# EAGLE board boarduino_breakout (EAGLE 4.16)
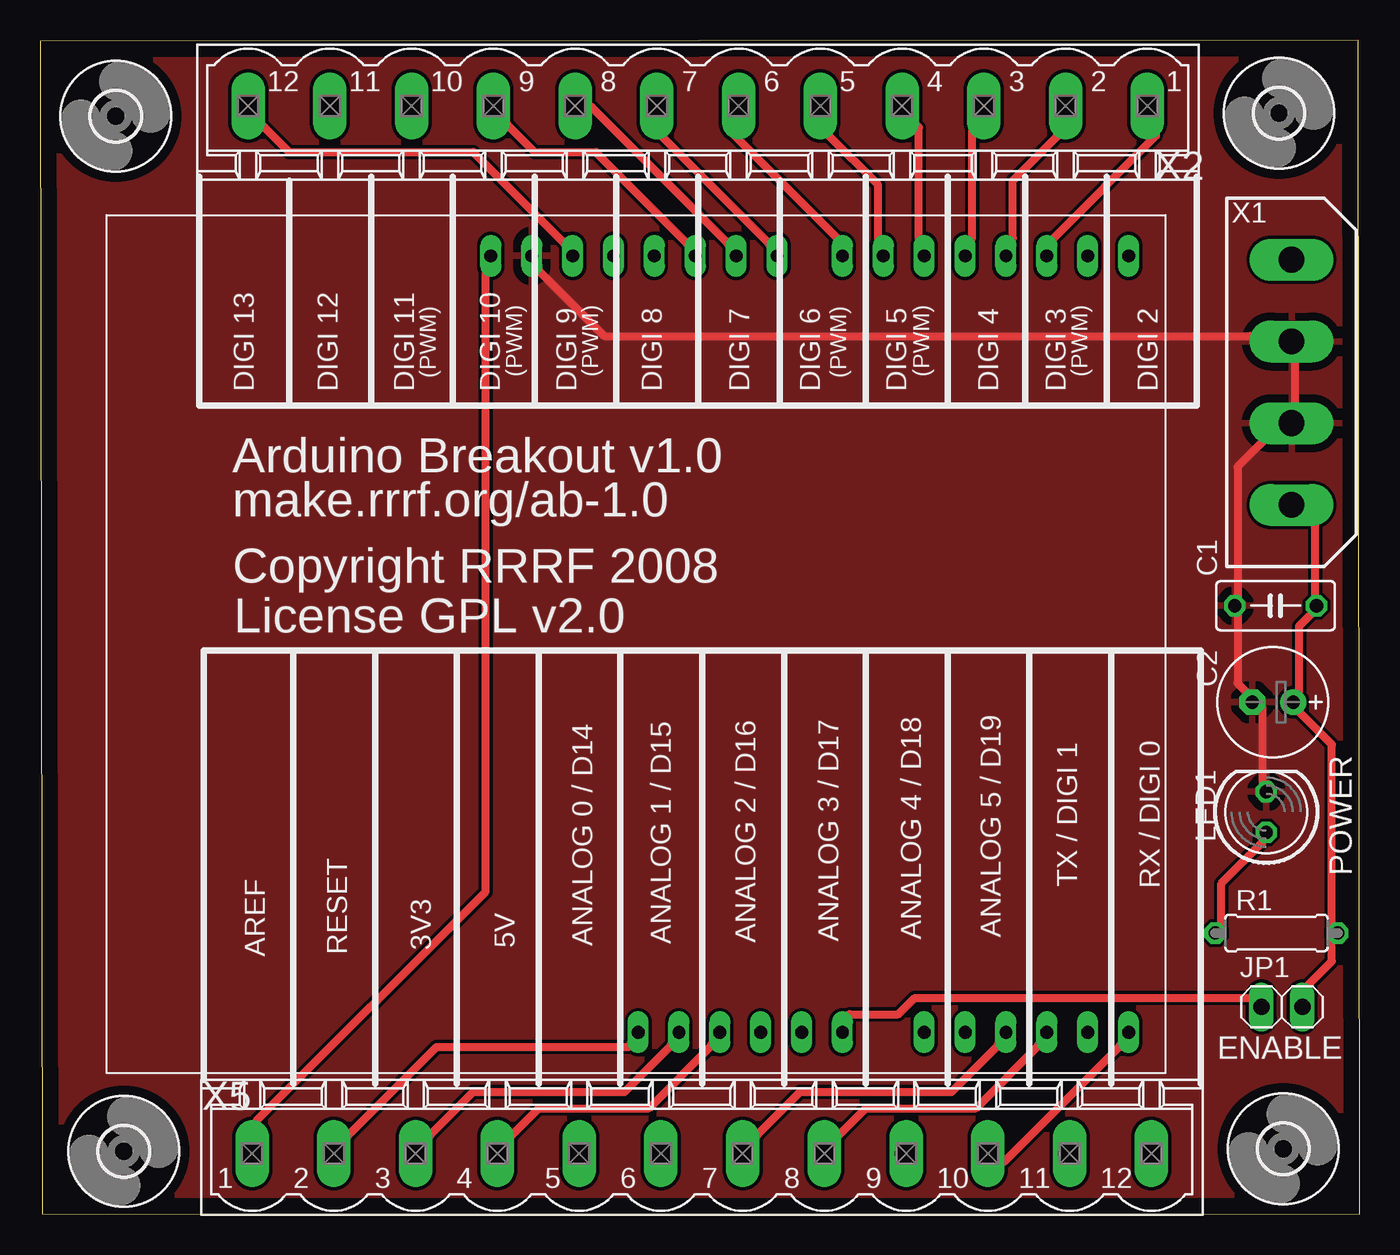
[diagram p0: board, top side]
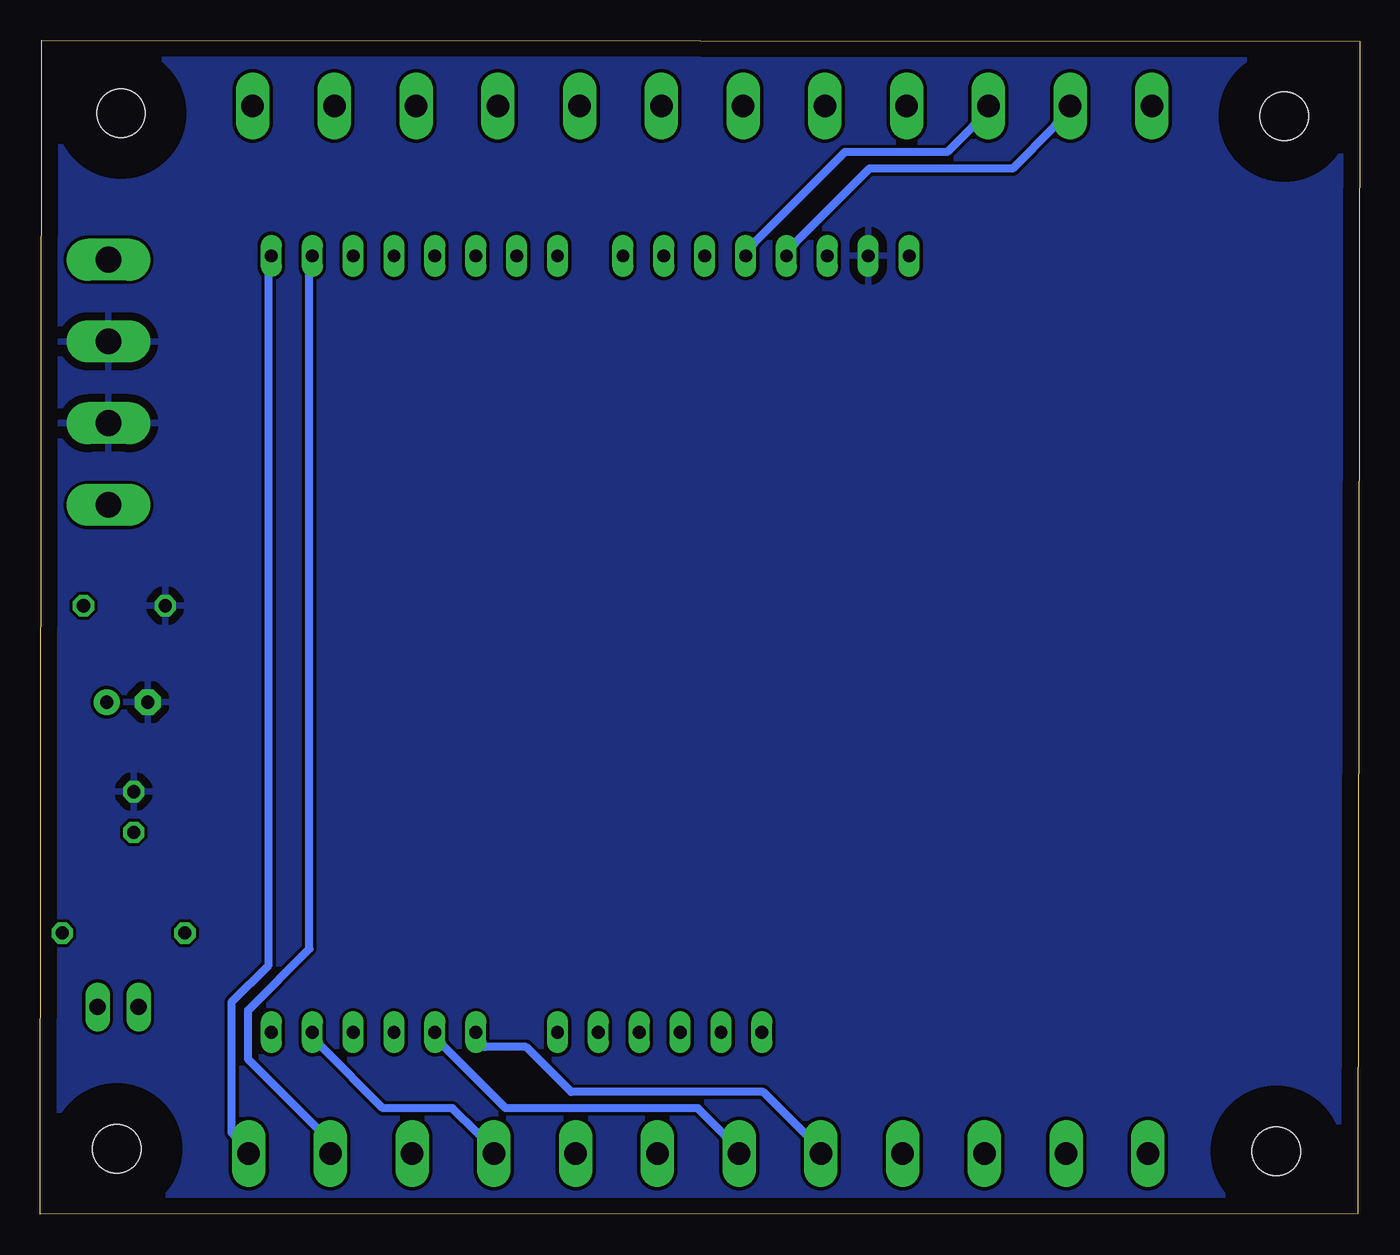
[diagram p1: board, bottom side, seen from below]

Size 81.99 x 72.99 mm. Coordinates in mm from the lower left corner, seen from the top.
Outline: 0.13,0.02 81.99,0 81.89,72.99 0,72.94 0.13,0.02
Copper layers (1*16): Top 0.035mm / dielectric 1.5mm / Bottom 0.035mm
Design rules "default": minimum track width 10mil, minimum drill 24mil, track to track 8mil, track to pad 8mil, pad to pad 8mil, via to via 8mil, smd to smd 8mil, copper to edge 40mil, drill to drill 8mil, minimum pad ring 10mil, minimum via ring 8mil, stop-mask expansion 4mil, vias tented up to drill 0mil, thermal gap 20mil
Net classes: 0 default: width 0.508 mm, drill 0.406 mm

## Footprints (pad centres in the part's own frame; a part is rotated, then mirrored left to right if it is on the bottom)
C050-030X075 = drill 0.813 octagon: 1 -2.54,0; 2 2.54,0
E2,5-7 = drill 0.813 pad 1.6 round: + -1.27,0 | drill 0.813 pad 1.6 octagon: - 1.27,0
3,0 = hole 3: 0,0
1X02 = drill 1.016 long: 1 -1.27,0; 2 1.27,0
LED5MM = drill 0.813 octagon: A -1.27,0; K 1.27,0
0207/7 = drill 0.813 octagon: 1 -3.81,0; 2 3.81,0
ARDUINO = drill 0.8 long: 3V3 6.604,-45.72; 5V 9.144,-45.72; ANALOG0 21.844,-45.72; ANALOG1 24.384,-45.72; ANALOG2 26.924,-45.72; ANALOG3 29.464,-45.72; ANALOG4 32.004,-45.72; ANALOG5 34.544,-45.72; AREF -5.08,2.54; DIGITAL2 29.464,2.54; DIGITAL3 26.924,2.54; DIGITAL4 24.384,2.54; DIGITAL5 21.844,2.54; DIGITAL6 19.304,2.54; DIGITAL7 16.764,2.54; DIGITAL8 12.7,2.54; DIGITAL9 10.16,2.54; DIGITAL10 7.62,2.54; DIGITAL11 5.08,2.54; DIGITAL12 2.54,2.54; DIGITAL13 0,2.54; GND -2.54,2.54; GND1 14.224,-45.72; GND2 11.684,-45.72; RESET 4.064,-45.72; RX 34.544,2.54; TX 32.004,2.54; VIN 16.764,-45.72
9090-4V = drill 1.6 pad 2.6 long: 1 -7.62,0; 2 -2.54,0; 3 2.54,0; 4 7.62,0
MSTBV12 = drill 1.397 long: 1 -27.94,0; 2 -22.86,0; 3 -17.78,0; 4 -12.7,0; 5 -7.62,0; 6 -2.54,0; 7 2.54,0; 8 7.62,0; 9 12.7,0; 10 17.78,0; 11 22.86,0; 12 27.94,0

## Placement (x,y rotation side)
C1  100nf  [C050-030X075]  76.76,37.84 180 top
C2  100uF  [E2,5-7]  76.59,31.84 180 top
H1  MOUNT-HOLE3.0  [3,0]  77.23,4.08 0 top
H2  MOUNT-HOLE3.0  [3,0]  76.97,68.45 0 top
H3  MOUNT-HOLE3.0  [3,0]  5.19,3.93 0 top
H4  MOUNT-HOLE3.0  [3,0]  4.69,68.27 0 top
JP1  [1X02]  77.15,12.9 0 top
LED1  [LED5MM]  76.18,25.01 90 top
R1  560  [0207/7]  76.81,17.49 0 top
U$1  ARDUINODIECIMILIA  [ARDUINO]  33.08,57.04 0 top
X1  9090-4V  [9090-4V]  77.75,51.72 270 top
X2  MSTBV12  [MSTBV12]  40.86,68.91 180 top
X5  MSTBV12  [MSTBV12]  41.11,3.78 0 top

## Library data of the parts
C1 C2 R1 = rcl
H1-H4 = holes
JP1 = pinhead
LED1 = led
U$1 = reprap
X1 = con-thomas-betts
X2 X5 = con-phoenix-508

## Nets
GND: C1.2 C2.- LED1.K U$1.GND X1.2 X1.3
N$1: LED1.A R1.1
N$3: U$1.DIGITAL13 X2.12
N$4: U$1.DIGITAL12 X2.11
N$5: U$1.DIGITAL11 X2.10
N$6: U$1.DIGITAL10 X2.9
N$7: U$1.DIGITAL9 X2.8
N$8: U$1.DIGITAL8 X2.7
N$9: U$1.DIGITAL7 X2.6
N$10: U$1.DIGITAL6 X2.5
N$11: U$1.DIGITAL5 X2.4
N$12: U$1.DIGITAL4 X2.3
N$13: U$1.DIGITAL3 X2.2
N$14: U$1.DIGITAL2 X2.1
N$15: U$1.TX X5.11
N$16: U$1.RX X5.12
N$17: U$1.ANALOG5 X5.10
N$18: U$1.ANALOG4 X5.9
N$19: U$1.ANALOG3 X5.8
N$20: U$1.ANALOG2 X5.7
N$21: U$1.ANALOG1 X5.6
N$22: U$1.ANALOG0 X5.5
N$23: U$1.AREF X5.1
N$24: U$1.RESET X5.2
N$25: U$1.3V3 X5.3
N$26: U$1.5V X5.4
N$27: JP1.1 U$1.VIN
VSS: C1.1 C2.+ JP1.2 R1.2 X1.4

## Tracks (layer width: path | path; a pad name or v marks a point on that pad's centre or on a via)
GND
  Top 0.508: LED1.K 75.93,26.92 75.93,31.49 C2.- 74.92,32.51 74.41,33.02 74.41,37.33 C1.2 74.41,38.35 74.41,46.48 75.93,48 X1.3 77.97,50.29 77.97,53.08 X1.2 75.17,54.61 35.04,54.61 30.98,58.67 U$1.GND
  pour Bottom: -0.77,74.92 83.05,74.92 83.05,-1.28 -0.77,-1.28
  pour Top: -0.77,74.92 83.05,74.92 83.05,-1.28 -0.77,-1.28
N$1
  Top 0.508: R1.1 73.39,18.03 73.39,20.57 75.93,23.11 LED1.A
N$3
  Top 0.508: U$1.DIGITAL13 32.5,60.45 26.91,66.03 15.48,66.03 13.96,67.56 X2.12
N$4
  Bottom 0.508: U$1.DIGITAL12 35.04,60.45 30.47,65.02 21.58,65.02 19.04,67.56 X2.11
N$5
  Bottom 0.508: U$1.DIGITAL11 37.58,60.45 31.99,66.03 25.64,66.03 24.12,67.56 X2.10
N$6
  Top 0.508: U$1.DIGITAL10 40.12,60.45 34.53,66.03 30.72,66.03 29.2,67.56 X2.9
N$7
  Top 0.508: U$1.DIGITAL9 42.66,60.45 34.28,68.83 X2.8
N$8
  Top 0.508: U$1.DIGITAL8 45.2,60.45 38.6,67.05 X2.7
N$9
  Top 0.508: U$1.DIGITAL7 49.52,60.7 43.17,67.05 X2.6
N$10
  Top 0.508: U$1.DIGITAL6 52.06,60.7 52.06,64 49.01,67.05 X2.5
N$11
  Top 0.508: U$1.DIGITAL5 54.6,60.7 54.6,67.56 X2.4
N$12
  Top 0.508: U$1.DIGITAL4 57.9,60.7 57.9,67.3 X2.3
N$13
  Top 0.508: U$1.DIGITAL3 60.44,60.7 60.44,64.26 63.23,67.05 X2.2
N$14
  Top 0.508: U$1.DIGITAL2 62.98,60.7 69.33,67.05 X2.1
N$15
  Bottom 0.508: U$1.TX 65.27,58.41 65.27,16.5 69.08,12.7 69.08,9.65 64.76,5.33 X5.11
N$16
  Bottom 0.508: U$1.RX 67.81,58.41 67.81,15.49 70.09,13.2 70.09,5.07 X5.12
N$17
  Top 0.508: U$1.ANALOG5 67.04,10.41 59.93,3.3 X5.10
N$18
  Bottom 0.508: U$1.ANALOG4 64.5,10.41 60.69,6.6 56.38,6.6 54.85,5.07 X5.9
N$19
  Top 0.508: U$1.ANALOG3 61.96,10.41 58.15,6.6 51.3,6.6 49.77,5.07 X5.8
N$20
  Top 0.508: U$1.ANALOG2 59.42,10.41 56.63,7.62 47.23,7.62 44.69,5.07 X5.7
N$21
  Bottom 0.508: U$1.ANALOG1 56.88,10.41 53.07,6.6 41.14,6.6 39.61,5.07 X5.6
N$22
  Bottom 0.508: U$1.ANALOG0 54.34,10.41 51.8,10.41 49.01,7.62 37.07,7.62 34.53,5.07 X5.5
N$23
  Top 0.508: U$1.AREF 27.67,58.41 27.67,20.06 13.45,5.84 X5.1
N$24
  Top 0.508: U$1.RESET 36.56,10.41 24.63,10.41 19.29,5.07 X5.2
N$25
  Top 0.508: U$1.3V3 39.1,10.41 36.31,7.62 26.91,7.62 24.37,5.07 X5.3
N$26
  Top 0.508: U$1.5V 41.64,10.41 37.83,6.6 30.98,6.6 29.45,5.07 X5.4
N$27
  Top 0.508: U$1.VIN 50.28,12.44 53.33,12.44 54.34,13.46 75.17,13.46 JP1.1
VSS
  Top 0.508: JP1.2 78.73,14.22 80.25,15.74 80.25,17.01 R1.2 80.25,18.03 80.25,29.21 78.22,31.24 C2.+ 78.22,32.51 78.22,36.57 78.98,37.33 C1.1 79.24,38.35 79.24,42.92 X1.4

## Text on the board
tPlace: DIGI 13 | DIGI 12 | DIGI 11 | (PWM) | DIGI 10 | (PWM) | DIGI 9 | (PWM) | DIGI 8 | DIGI 7 | DIGI 6 | (PWM) | DIGI 5 | (PWM) | DIGI 4 | DIGI 3 | (PWM) | DIGI 2 | Arduino Breakout v1.0 | make.rrrf.org/ab-1.0 | Copyright RRRF 2008 | License GPL v2.0 | TX / DIGI 1 | RX / DIGI 0 | POWER | ANALOG 5 / D19 | RESET | 3V3 | 5V | ANALOG 0 / D14 | ANALOG 1 / D15 | ANALOG 2 / D16 | ANALOG 3 / D17 | ANALOG 4 / D18 | AREF | ENABLE